# Altium PCB AudioAmp.PcbDoc
Units mil, origin at the board's own origin, x right, y up, seen from the top; angles counter-clockwise.
Board outline 3630 x 3543 mil, 2 copper layers (Top Layer, Bottom Layer); 197 components, 123 nets, 575 pads, 0 vias.
Unrouted connection lines stored in the file: 432.
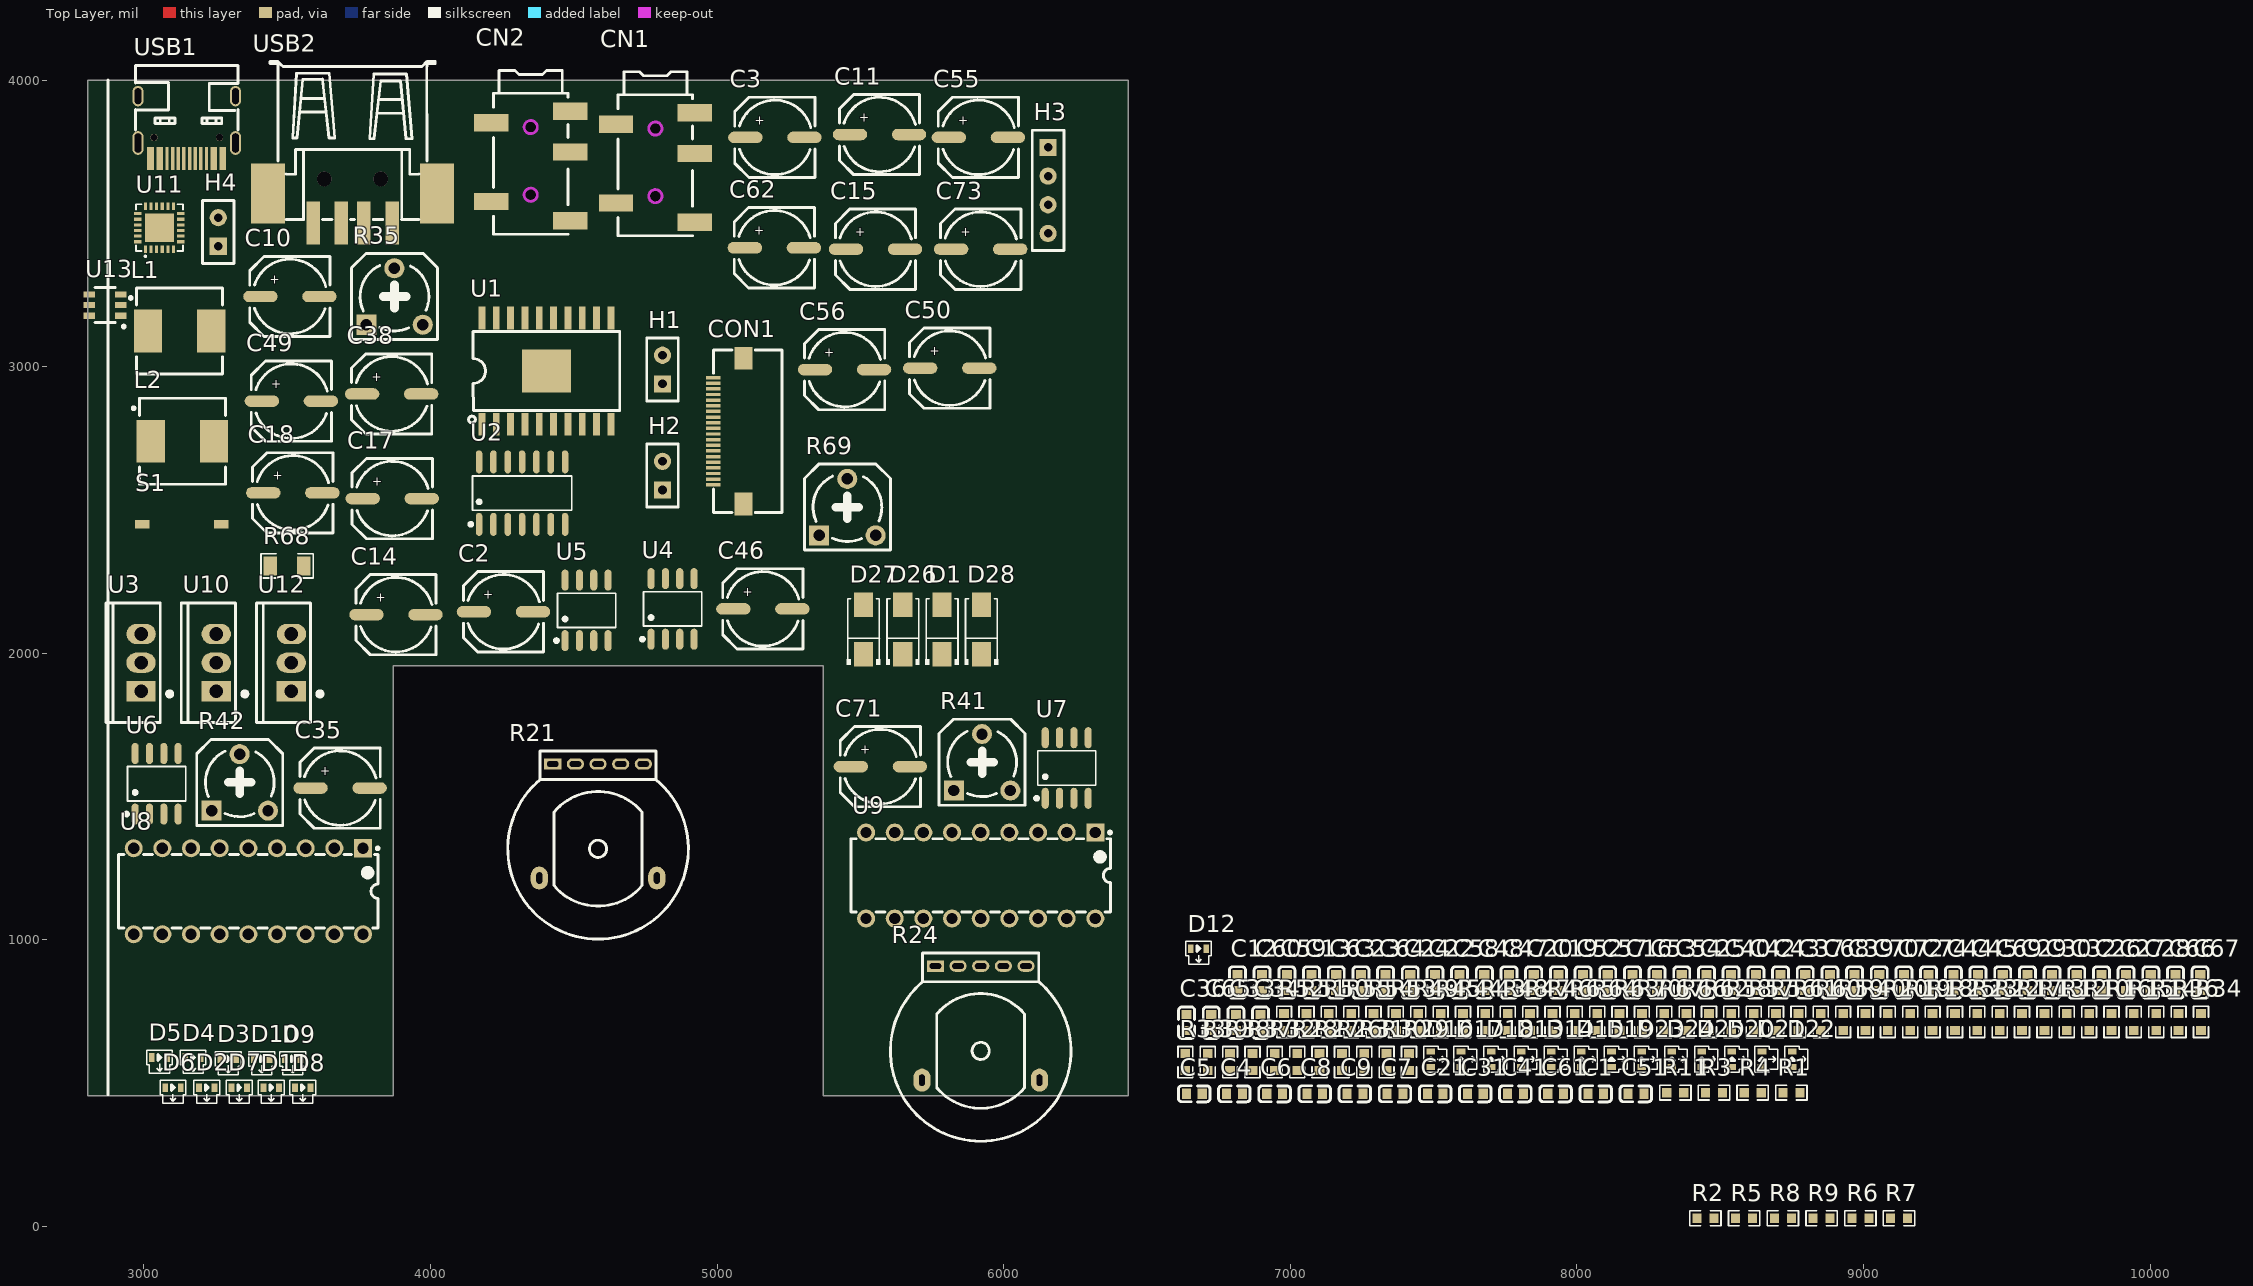
[diagram p0: Top Layer view]
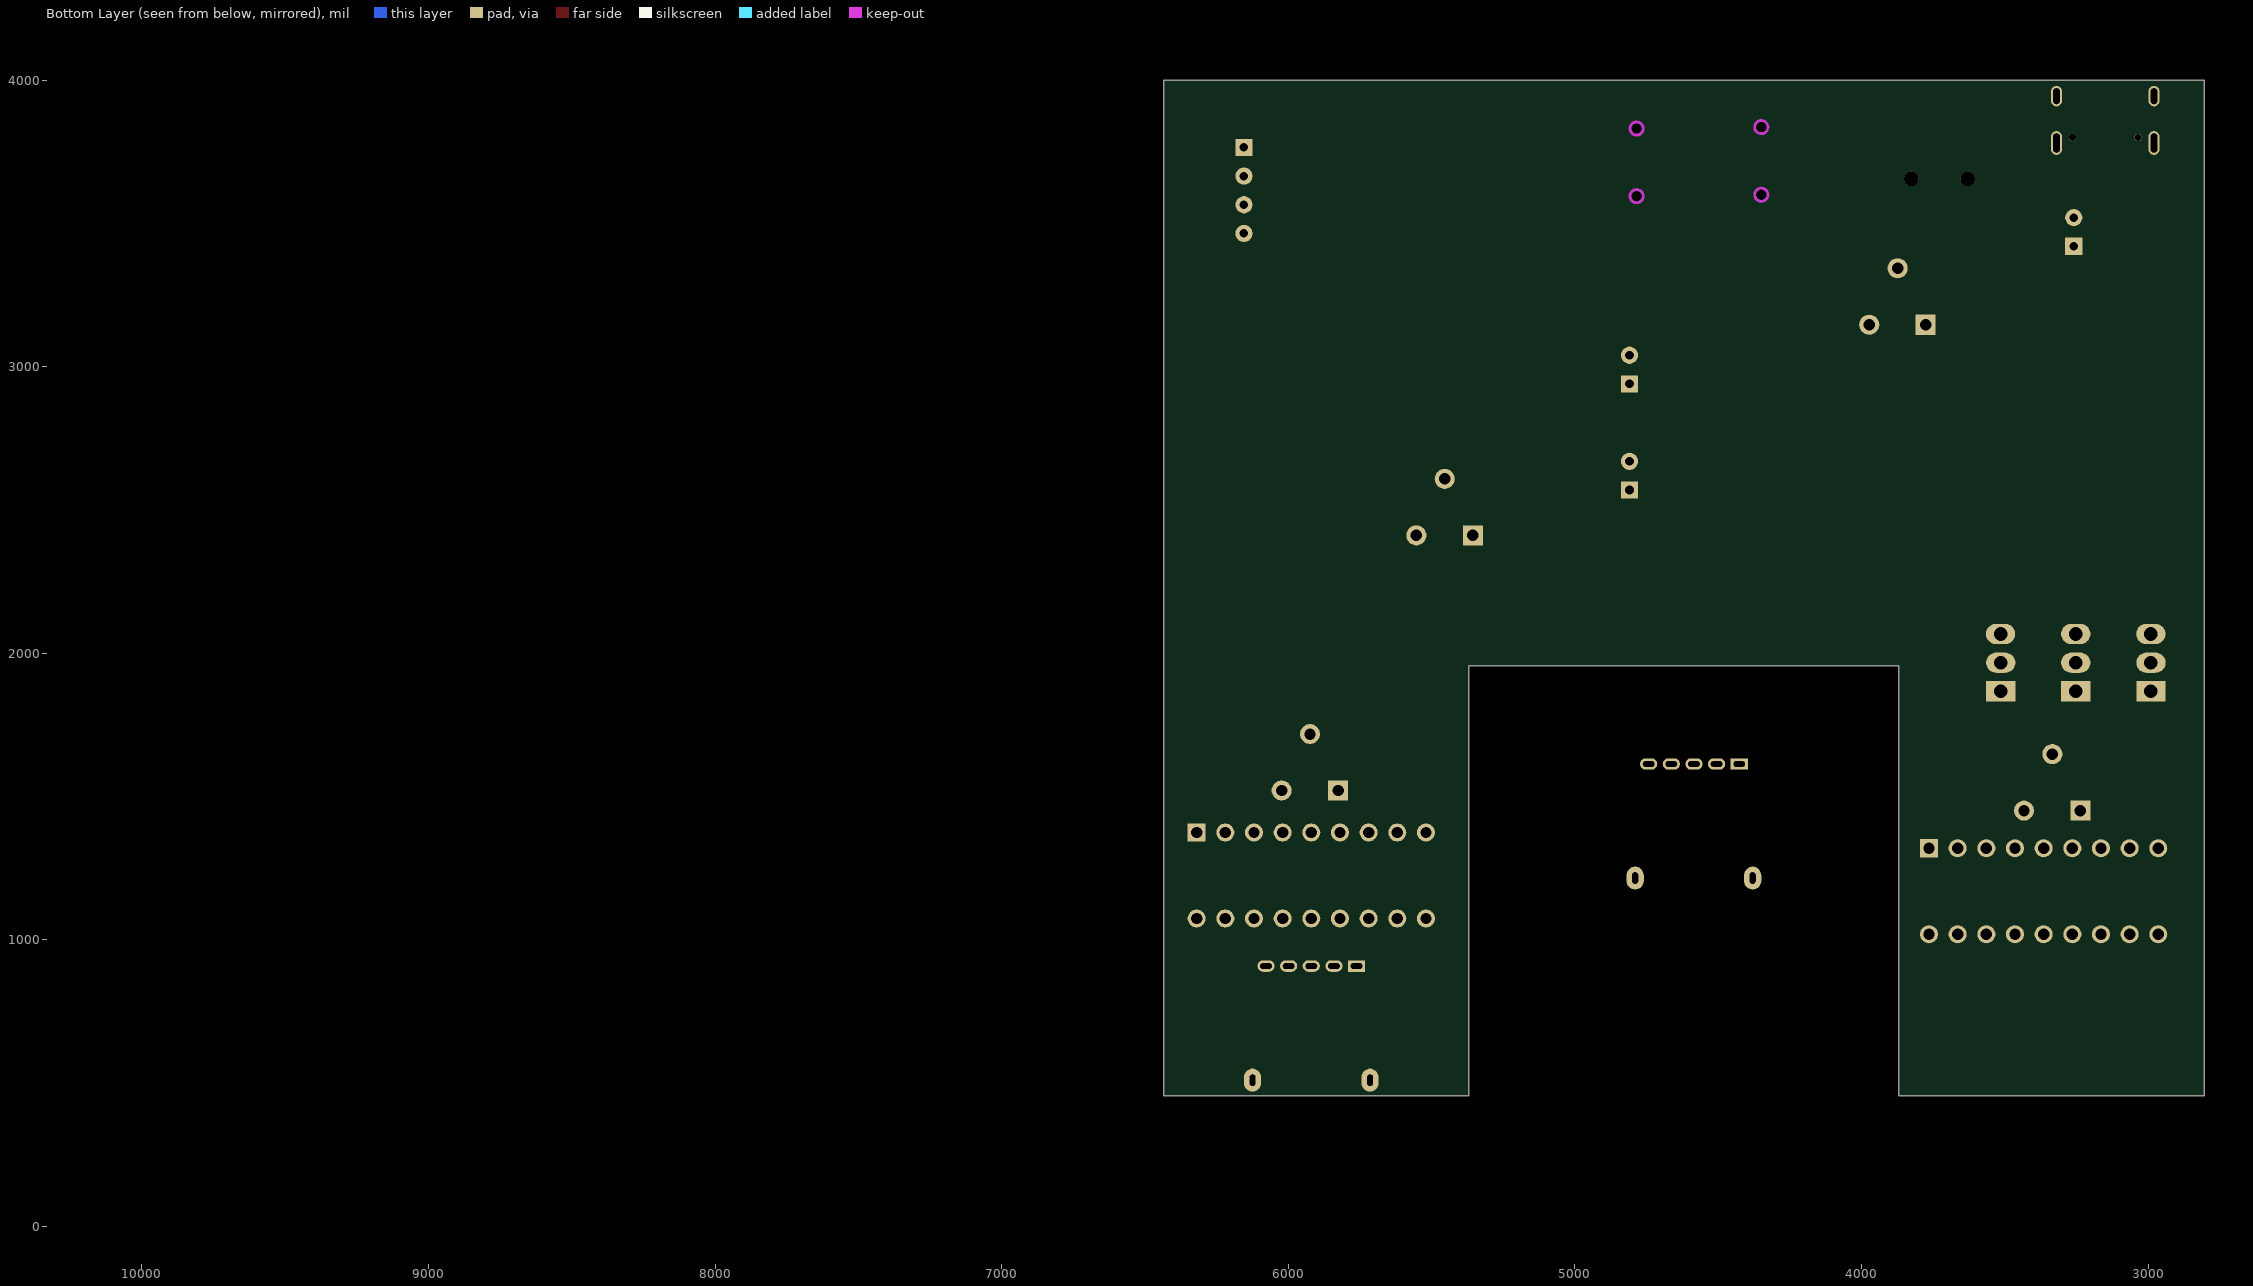
[diagram p1: Bottom Layer view, seen from below]

## Layer stack, top to bottom
Top Solder: solder mask 0.4, Solder Resist, Dk 3.5
Top Layer: signal copper 1.4
Dielectric 1: dielectric 12.6, FR-4, Dk 4.8
Bottom Layer: signal copper 1.4
Bottom Solder: solder mask 0.4, Solder Resist, Dk 3.5

## Board outline
2805,457 2805,4000 6435,4000 6435,457 5370,457 5370,1957 3870,1957 3870,457

## Design rules (kind name [scope] priority, off if disabled: settings)
Clearance [All] p1: gap=10 ignorepadtopadclearanceinfootprint=FALSE except(0: Arc-Hole Track-Hole SMDPad-Hole THPad-Hole Via-Hole Fill-Hole Poly-Hole Region-Hole Text-Hole)
PolygonConnect [All] p1: connectstyle=Relief reliefconductorwidth=10 reliefentries=4 polygonreliefangle="90 Angle" airgapwidth=10
RoomDefinition Audio_VU_LED [InComponentClass('Audio_VU_LED')] p1: confinementstyle=ConfineIn formatcopy=TRUE lockcomponents=FALSE outline 395,0 2395,0 2395,1000 395,1000
RoomDefinition Audio_Power [InComponentClass('Audio_Power')] p2: confinementstyle=ConfineIn formatcopy=TRUE lockcomponents=FALSE outline 400,1200 2400,1200 2400,2200 400,2200
RoomDefinition Audio_Amp [InComponentClass('Audio_Amp')] p3: confinementstyle=ConfineIn formatcopy=TRUE lockcomponents=FALSE outline 370,2550 2370,2550 2370,3550 370,3550
RoutingVias [All] p1: holewidth=28 width=50 viastyle="Through Hole" minholewidth=28 minwidth=50 maxholewidth=28 maxwidth=50
SolderMaskExpansion [All] p1: expansion=4 istentingtop=FALSE
Width [All] p1: maxlimit=10 minlimit=10 preferedwidth=10
30 further rules are at their usual default settings.

## Components (designator, comment, footprint, x,y, rotation, side; value= is the part's Value field where it differs from the comment)
C1 "CAP" C0603 8065.94,463.25 r0 top value=10uF
C2 "CAP_POL" CAP_SMD_6.3MM 4255,2145 r0 top value=220uF
C3 "CAP_POL" CAP_SMD_6.3MM 5202,3800 r0 top value=220uF
C4 "CAP" C0603 6805.4,463.25 r0 top value=10uF
C5 "CAP" C0603 6665.34,463.25 r0 top value=100nF
C6 "CAP" C0603 6945.45,463.25 r0 top value=10uF
C7 "CAP" C0603 7365.64,463.25 r0 top value=100nF
C8 "Cap" C0603 7085.52,463.25 r0 top value=1nF
C9 "CAP" C0603 7225.57,463.25 r0 top value=10uF
C10 "CAP_POL" CAP_SMD_6.3MM 3510,3245 r0 top value=220uF
C11 "CAP_POL" CAP_SMD_6.3MM 5567,3810 r0 top value=220uF
C12 "CAP" C0603 6815.78,851.88 r90 top value=10uF
C13 "CAP" C0603 7074.14,851.88 r90 top value=10uF
C14 "CAP_POL" CAP_SMD_6.3MM 3880,2135 r0 top value=220uF
C15 "CAP_POL" CAP_SMD_6.3MM 5553,3410 r0 top value=220uF
C16 "CAP" C0603 8193.72,851.88 r90 top value=10uF
C17 "CAP_POL" CAP_SMD_6.3MM 3867,2540 r0 top value=220uF
C18 "CAP_POL" CAP_SMD_6.3MM 3520,2560 r0 top value=220uF
C19 "Cap" C0603 7935.35,851.88 r90 top value=1nF
C20 "Cap" C0603 7849.23,851.88 r90 top value=1nF
C21 "Cap" C0603 7505.69,463.25 r0 top value=1nF
C22 "CAP" C0603 7504.75,851.88 r90 top value=2.7nF
C23 "CAP" C0603 7246.39,851.88 r90 top value=2.7nF
C24 "CAP" C0603 7418.63,851.88 r90 top value=1uF
C25 "CAP" C0603 8452.08,851.88 r90 top value=1uF
C26 "CAP" C0603 9830.02,851.88 r90 top value=1uF
C27 "CAP" C0603 9916.14,851.88 r90 top value=1uF
C28 "CAP" C0603 10002.26,851.88 r90 top value=2.7nF
C29 "CAP" C0603 9571.65,851.88 r90 top value=2.7nF
C30 "Cap" C0603 9657.77,851.88 r90 top value=1nF
C31 "Cap" C0603 7645.76,463.25 r0 top value=1nF
C32 "CAP" C0603 9743.9,851.88 r90 top value=10uF
C33 "CAP" C0603 6810.41,711.82 r90 top value=4.7uF
C34 "CAP" C0603 6896.53,711.82 r90 top value=10uF
C35 "CAP_POL" CAP_SMD_6.3MM 3685,1530 r0 top value=220uF
C36 "CAP" C0603 6638.17,711.82 r90 top value=10uF
C37 "CAP" C0603 8796.56,851.88 r90 top value=100nF
C38 "CAP_POL" CAP_SMD_6.3MM 3865,2905 r0 top value=100uF
C39 "CAP" C0603 8968.81,851.88 r90 top value=10uF
C40 "CAP" C0603 8538.2,851.88 r90 top value=10uF
C41 "CAP" C0603 7785.81,463.25 r0 top value=10uF
C42 "CAP" C0603 8624.32,851.88 r90 top value=4.7uF
C43 "CAP" C0603 8710.44,851.88 r90 top value=4.7uF
C44 "CAP" C0603 9313.29,851.88 r90 top value=4.7uF
C45 "CAP" C0603 9399.41,851.88 r90 top value=100nF
C46 "CAP_POL" CAP_SMD_6.3MM 5160,2155 r0 top value=100uF
C47 "CAP" C0603 7763.11,851.88 r90 top value=100nF
C48 "CAP" C0603 7676.99,851.88 r90 top value=100nF
C49 "CAP_POL" CAP_SMD_6.3MM 3515,2880 r0 top value=100uF
C50 "CAP_POL" CAP_SMD_6.3MM 5812,2995 r0 top value=100uF
C51 "CAP" C0603 8206,463.25 r0 top value=10nF
C52 "CAP" C0603 8021.48,851.88 r90 top value=10nF
C53 "CAP" C0603 8279.84,851.88 r90 top value=10uF
C54 "CAP" C0603 8365.96,851.88 r90 top value=10uF
C55 "CAP_POL" CAP_SMD_6.3MM 5912,3800 r0 top value=220uF
C56 "CAP_POL" CAP_SMD_6.3MM 5445,2990 r0 top value=220uF
C57 "CAP" C0603 8107.6,851.88 r90 top value=1uF
C58 "CAP" C0603 7590.87,851.88 r90 top value=2.2nF
C59 "CAP" C0603 6988.02,851.88 r90 top value=10uF
C60 "CAP" C0603 6901.9,851.88 r90 top value=10uF
C61 "CAP" C0603 7925.88,463.25 r0 top value=2.2uF
C62 "CAP_POL" CAP_SMD_6.3MM 5200,3415 r0 top value=220uF
C63 "CAP" C0603 7160.27,851.88 r90 top value=1uF
C64 "CAP" C0603 7332.51,851.88 r90 top value=100nF
C65 "CAP" C0603 6724.29,711.82 r90 top value=10uF
C66 "CAP" C0603 10088.38,851.88 r90 top value=10uF
C67 "CAP" C0603 10174.5,851.88 r90 top value=100nF
C68 "CAP" C0603 8882.68,851.88 r90 top value=1uF
C69 "CAP" C0603 9485.53,851.88 r90 top value=100nF
C70 "CAP" C0603 9054.93,851.88 r90 top value=1uF
C71 "CAP_POL" CAP_SMD_6.3MM 5570,1605 r0 top value=220uF
C72 "CAP" C0603 9141.05,851.88 r90 top value=1uF
C73 "CAP_POL" CAP_SMD_6.3MM 5920,3410 r0 top value=220uF
C74 "CAP" C0603 9227.17,851.88 r90 top value=1uF
CN1 "Audio3.5Con" Audio3.5_3Pin 4785,3695 r270 top
CN2 "Audio3.5Con" Audio3.5_3Pin 4350,3700 r270 top
CON1 "AFC01-S20FCC-00" FPC-SMD_20P_0.5 5040,2775 r270 top
D1 "Diode SBD" SMA_L4.3 5785.26,2082.98 r90 top
D2 "LED" LED0603_Side 3220,485 r270 top
D3 "LED" LED0603_Side 3295,585 r270 top
D4 "LED" LED0603_Side 3172,590 r270 top
D5 "LED" LED0603_Side 3055,590 r270 top
D6 "LED" LED0603_Side 3102,485 r270 top
D7 "LED" LED0603_Side 3333,485 r270 top
D8 "LED" LED0603_Side 3555,485 r270 top
D9 "LED" LED0603_Side 3520,585 r270 top
D10 "LED" LED0603_Side 3412,585 r270 top
D11 "LED" LED0603_Side 3445,485 r270 top
D12 "LED" LED0603_Side 6680,970 r270 top
D13 "LED" LED0603_Side 7805.68,583.98 r0 top
D14 "LED" LED0603_Side 7910.68,583.98 r0 top
D15 "LED" LED0603_Side 8015.68,583.98 r0 top
D16 "LED" LED0603_Side 7490.68,583.98 r0 top
D17 "LED" LED0603_Side 7595.68,583.98 r0 top
D18 "LED" LED0603_Side 7700.68,583.98 r0 top
D19 "LED" LED0603_Side 8120.68,583.98 r0 top
D20 "LED" LED0603_Side 8540.68,583.98 r0 top
D21 "LED" LED0603_Side 8645.68,583.98 r0 top
D22 "LED" LED0603_Side 8750.68,583.98 r0 top
D23 "LED" LED0603_Side 8225.68,583.98 r0 top
D24 "LED" LED0603_Side 8330.68,583.98 r0 top
D25 "LED" LED0603_Side 8435.68,583.98 r0 top
D26 "Diode SBD" SMA_L4.3 5648.21,2082.98 r90 top
D27 "Diode SBD" SMA_L4.3 5511.17,2082.98 r90 top
D28 "Diode SBD" SMA_L4.3 5922.31,2082.98 r90 top
H1 "Header_P2" H_2.54_P2 4810,2990 r90 top
H2 "Header_P2" H_2.54_P2 4810,2620 r90 top
H3 "Header_P4" H_2.54_P4 6155,3615 r270 top
H4 "Header_P2" H_2.54_P2 3260,3470 r90 top
L1 "INDU" SMD_L7.1 3125,3125 r0 top value=1uH
L2 "INDU" SMD_L7.1 3135,2740 r0 top value=4.7uH
R1 "Reg" R0603 8748.44,467.41 r0 top value=1K
R2 "Reg" R0603 8448.5,29.01 r0 top value=1K
R3 "Reg" R0603 8478.31,467.41 r0 top value=1K
R4 "Reg" R0603 8613.38,467.41 r0 top value=1K
R5 "Reg" R0603 8583.56,29.01 r0 top value=1K
R6 "Reg" R0603 8988.75,29.01 r0 top value=1K
R7 "Reg" R0603 9123.81,29.01 r0 top value=1K
R8 "Reg" R0603 8718.62,29.01 r0 top value=1K
R9 "Reg" R0603 8853.68,29.01 r0 top value=10K
R10 "Reg" R0603 9787.07,714.01 r90 top value=50R
R11 "Reg" R0603 8343.25,467.41 r0 top value=50R
R12 "Reg" R0603 9709.05,714.01 r90 top value=10K
R13 "Reg" R0603 9631.04,714.01 r90 top value=1K
R14 "Reg" R0603 10021.12,714.01 r90 top value=1K
R15 "Reg" R0603 9943.1,714.01 r90 top value=1K
R16 "Reg" R0603 9865.08,714.01 r90 top value=1K
R17 "Reg" R0603 9553.02,714.01 r90 top value=1K
R18 "Reg" R0603 9240.96,714.01 r90 top value=1K
R19 "Reg" R0603 9162.94,714.01 r90 top value=1K
R20 "Reg" R0603 9084.92,714.01 r90 top value=1K
R21 "Res_Tap_2" RES_TAP_5Pin 4585,1415 r180 top
R22 "Reg" R0603 9475,714.01 r90 top value=1K
R23 "Reg" R0603 9396.99,714.01 r90 top value=1K
R24 "Res_Tap_2" RES_TAP_5Pin 5920,710 r180 top
R25 "Reg" R0603 9318.97,714.01 r90 top value=1K
R26 "Reg" R0603 7180.12,573.95 r90 top value=1K
R27 "Reg" R0603 7102.1,573.95 r90 top value=10K
R28 "Reg" R0603 7024.09,573.95 r90 top value=10K
R29 "Reg" R0603 7414.17,573.95 r90 top value=1K
R30 "Reg" R0603 7336.15,573.95 r90 top value=1K
R31 "Reg" R0603 7258.14,573.95 r90 top value=1K
R32 "Reg" R0603 6946.07,573.95 r90 top value=1K
R33 "Reg" R0603 6634.01,573.95 r90 top value=10K
R34 "Reg" R0603 10177.15,714.01 r90 top value=1K
R35 "Res Tap" RES_TAP_HOR 3875,3245 r0 top value=10K
R36 "Reg" R0603 10099.13,714.01 r90 top value=1K
R37 "Reg" R0603 6868.06,573.95 r90 top value=1K
R38 "Reg" R0603 6790.04,573.95 r90 top value=10R
R39 "Reg" R0603 6712.02,573.95 r90 top value=10R
R40 "Reg" R0603 9006.91,714.01 r90 top value=10K
R41 "Res Tap" RES_TAP_HOR 5925,1620 r0 top value=10K
R42 "Res Tap" RES_TAP_HOR 3335,1550 r0 top value=10K
R43 "Reg" R0603 7680.64,714.01 r90 top value=10R
R44 "Reg" R0603 7602.62,714.01 r90 top value=10R
R45 "Reg" R0603 7524.6,714.01 r90 top value=1K
R46 "Reg" R0603 7914.68,714.01 r90 top value=10R
R47 "Reg" R0603 7836.67,714.01 r90 top value=10R
R48 "Reg" R0603 7758.65,714.01 r90 top value=1K
R49 "Reg" R0603 7446.59,714.01 r90 top value=1K
R50 "Reg" R0603 7134.52,714.01 r90 top value=100R
R51 "Reg" R0603 7056.51,714.01 r90 top value=100R
R52 "Reg" R0603 6978.49,714.01 r90 top value=10k
R53 "Reg" R0603 7368.57,714.01 r90 top value=10k
R54 "Reg" R0603 7290.56,714.01 r90 top value=20K
R55 "Reg" R0603 7212.54,714.01 r90 top value=20K
R56 "Reg" R0603 8694.84,714.01 r90 top value=560R
R57 "Reg" R0603 8616.83,714.01 r90 top value=1K
R58 "Reg" R0603 8538.81,714.01 r90 top value=560R
R59 "Reg" R0603 8928.89,714.01 r90 top value=1K
R60 "Reg" R0603 8850.88,714.01 r90 top value=0R
R61 "Reg" R0603 8772.86,714.01 r90 top value=1K
R62 "Reg" R0603 8460.8,714.01 r90 top value=0R
R63 "Reg" R0603 8148.73,714.01 r90 top value=2R
R64 "Reg" R0603 8070.72,714.01 r90 top value=1K
R65 "Reg" R0603 7992.7,714.01 r90 top value=100K
R66 "Reg" R0603 8382.78,714.01 r90 top value=2M
R67 "Reg" R0603 8304.76,714.01 r90 top value=1M
R68 "Reg" R1206 3500,2305 r0 top value=0.01R
R69 "Res Tap" RES_TAP_HOR 5455,2510 r0 top value=10K
R70 "Reg" R0603 8226.75,714.01 r90 top value=300R
S1 "KEY-2P" KEY_SOT_P2 3120,2455 r180 top
U1 "TPA6120A2DWP" HSOP-20 4405,2985.04 r0 top
U2 "OPA4134UA" SOIC-14 4320,2559.02 r0 top
U3 "LM78XX" TO-220-3_2.54 2990.72,1967.52 r90 top
U4 "LM386D" SOP-8 4845,2155 r0 top
U5 "LM386D" SOP-8 4545,2150 r0 top
U6 "LM386D" SOP-8 3045,1545 r0 top
U7 "LM386D" SOP-8 6220,1600 r0 top
U8 "XD3915" DIP-18 3365,1170 r180 top
U9 "XD3915" DIP-18 5920,1225 r180 top
U10 "LM78XX" TO-220-3_2.54 3252.89,1967.52 r90 top
U11 "IP5209" QFN-24 3054.84,3485.1 r0 top
U12 "LM79XX" TO-220-3_2.54 3515.05,1967.52 r90 top
U13 "SX1308" SOT-23-6 2865,3215 r0 top
USB1 "TYPEC-304-ACP16" USB-C-SMD_TYPE-C-16P 3150,3840 r180 top
USB2 "USB_TypeA母座" USB_TYPEA-SMD 3728.42,3578.22 r180 top

## Footprints (in the part's own frame and the unit in brackets; to place one, negate y for a bottom-side part, rotate by r counter-clockwise, add the part's x,y. Pads: shape width x height; smd on the part's side, far side on the other; paste and mask are expansions set on the pad)
Audio3.5_3Pin [mil] "3.5mm3Pin音频接口"
  rect 60x120 smd: 1(-191,137.5) 2(191,137.5) 3(124,-137.5) 4(-49,137.5) 5(-151,-137.5)
  Keep-Out Layer board cut-out: -136,-23 -144.8,-21.25 -152.26,-16.26 -157.25,-8.8 -159,0 -159,0 -157.25,8.8 -152.26,16.26 -144.8,21.25 -136,23 -136,23 -127.2,21.25 -119.74,16.26 -114.75,8.8 -113,0 -113,0 -114.75,-8.8 -119.74,-16.26 -127.2,-21.25 -136,-23
  Keep-Out Layer board cut-out: 77,0 78.75,-8.8 83.74,-16.26 91.2,-21.25 100,-23 100,-23 108.8,-21.25 116.26,-16.26 121.25,-8.8 123,0 123,0 121.25,8.8 116.26,16.26 108.8,21.25 100,23 100,23 91.2,21.25 83.74,16.26 78.75,8.8 77,0
  Keep-Out Layer circle w10: c-136,0 r23
  Keep-Out Layer circle w10: c100,0 r23
  silkscreen extent -334,-130 238,130, body extent -389,-179 359,175, height 218
C0603 [mm]
  rect 0.8x0.9 smd: 1(-0.7,0) 2(0.7,0)
  silkscreen extent -1.41,-0.71 1.39,0.72, body extent -0.8,-0.41 0.8,0.45, height 0.89
CAP_SMD_6.3MM [mil] "SMD电容,10mm"
  oval 120x40 smd: 1(-103,0) 2(103,0)
  silkscreen extent -140,-140 140,140, body extent -137,-130 139,130, height 154
DIP-18 [mm]
  rect 1.6x1.6 hole 1: 1(-10.16,-3.81)
  round 1.6 hole 1: 2(-7.62,-3.81) 3(-5.08,-3.81) 4(-2.54,-3.81) 5(0,-3.81) 6(2.54,-3.81) 7(5.08,-3.81) 8(7.62,-3.81) 9(10.16,-3.81) 10(10.16,3.81) 11(7.62,3.81) 12(5.08,3.81) 13(2.54,3.81) 14(0,3.81) 15(-2.54,3.81) 16(-5.08,3.81) 17(-7.62,3.81) 18(-10.16,3.81)
  silkscreen extent -11.58,-3.93 11.5,3.25, body extent -11,-3.81 11,4.06, height 5
FPC-SMD_20P_0.5 [mm] "FPC连接器"
  rect 0.3x1.3 smd: 1(-4.752,-1.339) 2(-4.252,-1.339) 3(-3.752,-1.339) 4(-3.252,-1.339) 5(-2.752,-1.339) 6(-2.252,-1.339) 7(-1.752,-1.339) 8(-1.252,-1.339) 9(-0.752,-1.339) 10(-0.252,-1.339) 11(0.248,-1.339) 12(0.748,-1.339) 13(1.248,-1.339) 14(1.748,-1.339) 15(2.248,-1.339) 16(2.748,-1.339) 17(3.248,-1.339) 18(3.748,-1.339) 19(4.248,-1.339) 20(4.748,-1.339)
  rect 2x1.6 smd: 21(6.45,1.339) 22(-6.45,1.339)
  silkscreen extent -7.2,-1.34 7.2,4.76
H_2.54_P2 [mil] "2Pin Header"
  rect 60x60 hole 30: 1(-50,0)
  round 60 hole 30: 2(50,0)
  silkscreen extent -110,-55 110,55, body extent -100,-50 100,50, height 336
H_2.54_P4 [mil]
  rect 60x60 hole 30: 1(-150,0)
  round 60 hole 30: 2(-50,0) 3(50,0) 3(150,0)
  silkscreen extent -210,-55 210,55, body extent -200,-45 100,55, height 315
HSOP-20 [mm]
  rect 0.6x2 smd: 1(-5.715,-4.7) 2(-4.445,-4.7) 3(-3.175,-4.7) 4(-1.905,-4.7) 5(-0.635,-4.7) 6(0.635,-4.7) 7(1.905,-4.7) 8(3.175,-4.7) 9(4.445,-4.7) 10(5.715,-4.7) 11(5.715,4.7) 12(4.445,4.7) 13(3.175,4.7) 14(1.905,4.7) 15(0.635,4.7) 16(-0.635,4.7) 17(-1.905,4.7) 18(-3.175,4.7) 19(-4.445,4.7) 20(-5.715,4.7)
  rect 4.32x3.81 smd: 21(0,0)
  silkscreen extent -6.9,-4.6 6.5,3.5
KEY_SOT_P2 [mil] "KEY_SOT_P2"
  rect 50x30 smd: 1(125.59,5) 2(-150,5)
  body extent -174,-67 147,75, height 98
LED0603_Side [mil]
  rect 30x20 smd: 1(0,27) 2(0,-27)
  silkscreen extent -25,-45 55,45
QFN-24 [mm]
  rect 0.28x0.665 smd: 1(-1.25,-1.907) 2(-0.75,-1.907) 3(-0.25,-1.907) 4(0.25,-1.907) 5(0.75,-1.907) 6(1.25,-1.907) 13(1.25,1.907) 14(0.75,1.907) 15(0.25,1.907) 16(-0.25,1.907) 17(-0.75,1.907) 18(-1.25,1.907)
  rect 0.665x0.28 smd: 7(1.907,-1.25) 8(1.907,-0.75) 9(1.907,-0.25) 10(1.907,0.25) 11(1.907,0.75) 12(1.907,1.25) 19(-1.907,1.25) 20(-1.907,0.75) 21(-1.907,0.25) 22(-1.907,-0.25) 23(-1.907,-0.75) 24(-1.907,-1.25)
  rect 2.55x2.55 smd: 25(0,0)
  silkscreen extent -2.08,-2.61 2.08,2.08, body extent -2,-2 2,2, height 0.9
R0603 [mil]
  rect 31.75x34.02 smd: 1(-29.66,0) 2(29.66,0)
  silkscreen extent -55,-26 55,26, body extent -31,-17 32,17, height 19
R1206 [mil]
  rect 47.54x66.97 smd: 1(-58.22,0) 2(58.22,0)
  silkscreen extent -91,-42 91,42, body extent -63,-31 63,32, height 22
RES_TAP_5Pin [mil] "双联电位器"
  rect 60x40 hole 20 slot 40 at 0 deg: 1(158,-199)
  oval 60x40 hole 20 slot 40 at 0 deg: 2(79,-199) 3(0,-199) 4(-79,-199) 5(-158,-199)
  oval 60x80 hole 40 slot 20 at 0 deg: 6(-205,199) 6(205,199)
  silkscreen extent -315,-244 315,412
RES_TAP_HOR [mil] "卧式电位器"
  rect 70x70 hole 40: 1(-98.5,-98.5)
  round 70 hole 40: 2(98.5,-98.5) 3(-0.5,98.5)
  silkscreen extent -150,-150 150,150
SMA_L4.3 [mm] "SMA_DIode"
  rect 2.185x1.7 smd: 1(-2.2,0) 2(2.2,0)
  silkscreen extent -3.11,-1.48 2.73,1.48, body extent -2.6,-1.3 2.6,1.3, height 2.4
SMD_L7.1 [mm]
  rect 2.5x3.8 smd: 1(-2.8,0) 2(2.8,0)
  silkscreen extent -4.44,-3.81 3.81,3.81, body extent -3.65,-3.3 3.65,3.3, height 4.95
SOIC-14 [mil]
  oval 22.6x80.24 smd: 1(-150,-109.02) 2(-100,-109.02) 3(-50,-109.02) 4(0,-109.02) 5(50,-109.02) 6(100,-109.02) 7(150,-109.02) 8(150,109.02) 9(100,109.02) 10(50,109.02) 11(0,109.02) 12(-50,109.02) 13(-100,109.02) 14(-150,109.02)
  silkscreen extent -185,-115 173,60
SOP-8 [mm]
  oval 0.63x1.865 smd: 1(-1.905,-2.682) 2(-0.635,-2.682) 3(0.635,-2.682) 4(1.905,-2.682) 5(1.905,2.682) 6(0.635,2.682) 7(-0.635,2.682) 8(-1.905,2.682)
  silkscreen extent -2.82,-2.83 2.58,1.52, body extent -2.49,-2.92 2.41,3.06, height 1.58
SOT-23-6 [mm]
  rect 1x0.55 smd: 1(1.4,-0.95) 2(1.4,0) 3(1.4,0.95) 4(-1.4,0.95) 5(-1.4,0) 6(-1.4,-0.95)
  silkscreen extent -0.9,-2.03 1.78,1.55, body extent -1.21,-1.4 1.21,1.4, height 1.09
TO-220-3_2.54 [mm]
  rect 1.8x2.6 hole 1.2: 1(-2.54,0.005)
  oval 1.8x2.6 hole 1.2: 2(0,0.005) 3(2.54,-0.005)
  silkscreen extent -5.3,-2.73 5.3,3.09, body extent -4.95,-1.96 4.95,2.54, height 19.31
USB-C-SMD_TYPE-C-16P [mm] "全引脚USB TYPEC母座"
  rect 0.6x2.032 smd: A1B12(-3.2,2.893) A4B9(-2.4,2.893) B1A12(3.2,2.893) B4A9(2.4,2.893)
  rect 0.3x2.032 smd: A5(-1.25,2.893) A6(-0.25,2.893) A7(0.25,2.893) A8(1.25,2.893) B5(1.75,2.893) B6(0.75,2.893) B7(-0.75,2.893) B8(-1.75,2.893)
  oval 1x1.8 hole 0.6 slot 1.4 at 90 deg: EP(-4.32,-2.639) EP(4.32,-2.639)
  oval 1x2.1 hole 0.6 slot 1.7 at 90 deg: EP(-4.32,1.511) EP(4.32,1.511)
  round 0.65 hole 0.65 unplated: ""(-2.9,1.011) ""(2.9,1.021)
  silkscreen extent -4.55,-5.37 4.55,0.36, body extent -4.47,-5.32 4.47,2.58, height 3.13
USB_TYPEA-SMD [mm] "USBA母座"
  rect 1.2x3.8 smd: 1(-3.505,1.95) 2(-1.005,1.95) 3(0.996,1.95) 4(3.496,1.95)
  rect 3x5.3 smd: 5(-7.5,-0.65) 5(7.5,-0.65)
  round 1.3 hole 1.3 unplated: ""(-2.5,-1.95) ""(2.5,-1.95)
  silkscreen extent -7.32,-12.35 7.33,1.65, body extent -8.39,-12.45 8.39,3.07, height 7.95

## Part data
C1 C4 C5 C6 C7 C9 C12 C13 C16 C22 C23 C24 C25 C26 C27 C28 C29 C32 C33 C34 C36 C37 C39 C40 C41 C42 C43 C44 C45 C47 C48 C51 C52 C53 C54 C57 C58 C59 C60 C61 C63 C64 C65 C66 C67 C68 C69 C70 C72 C74: "Cap", BOM_Manufacturer="Huaxin S&T", BOM_Manufacturer Part=0603B103K101CT, BOM_Supplier=LCSC, BOM_Supplier Part=C302008, Contributor=LCSC, nameAlias=Capacitance, spicePre=C, spiceSymbolName=0603B103K101CT
C2 C3 C10 C11 C14 C15 C17 C18 C35 C38 C46 C49 C50 C55 C56 C62 C71 C73: "极性电容"
C8 C19 C20 C21 C30 C31: library part CAP, BOM_Manufacturer="Huaxin S&T", BOM_Manufacturer Part=0603B103K101CT, BOM_Supplier=LCSC, BOM_Supplier Part=C302008, Contributor=LCSC, nameAlias=Capacitance, spicePre=C, spiceSymbolName=0603B103K101CT
CN1 CN2: library part AudioCon3, "3.5mm 3Pin 音频接口", BOM_JLCPCB Part Class="Extended Part", BOM_Manufacturer=G-Switch(品赞), BOM_Manufacturer Part=PJ-393, BOM_Supplier=LCSC, BOM_Supplier Part=C2837065, Contributor=LCSC, spicePre=C, spiceSymbolName=PJ-393_C2837065
CON1: library part FPC_CONN_20, "FPC连接器20Pin", BOM_JLCPCB Part Class="Extended Part", BOM_Manufacturer=JUSHUO, BOM_Manufacturer Part=AFC01-S20FCC-00, BOM_Supplier=LCSC, BOM_Supplier Part=C262274, Contributor=LCSC, spicePre=F, spiceSymbolName=AFC01-S20FCC-00
D1 D26 D27 D28: "Schottky Rectifier", ComponentLink1Description="Manufacturer Link", ComponentLink1URL=http://www.irf.com/, ComponentLink2Description=Datasheet, ComponentLink2URL=http://www.irf.com/product-info/datasheets/data/10tq.pdf, DatasheetVersion=PD-2.057B, LatestRevisionDate=17-Jul-2002, LatestRevisionNote="Re-released for DXP Platform.", Note="Terminal 2 is the TAB and is electrically connected to the cathode", PackageDescription="TO, Thru-Hole, Vertical, Heatsink Mounted; 3 In-Line Leads (1 Absent); Pitch 2.54 mm", PackageReference=TO-220AC, PackageVersion=Feb-1998, Published=8-Jun-2000, Publisher="Altium Limited"
D2 D3 D4 D5 D6 D7 D8 D9 D10 D11 D12 D13 D14 D15 D16 D17 D18 D19 D20 D21 D22 D23 D24 D25: library part LED0, LatestRevisionDate=08-Jul-2005, LatestRevisionNote="Mech Layer 1 removed.", PackageDescription="LED; 2 Leads", PackageReference=LED-0, Published=8-Jun-2000, Publisher="Altium Limited"
H1 H2 H4: "2Pin排针"
H3: "4Pin排针"
L1 L2: library part IND, "电感", BOM_JLCPCB Part Class="Extended Part", BOM_Manufacturer="Sunltech Tech", BOM_Manufacturer Part=SLO0630H150MTT, BOM_Supplier=LCSC, BOM_Supplier Part=C182182, Contributor=LCSC, nameAlias=Inductance, spicePre=L, spiceSymbolName=SLO0630H150MTT
R1 R2 R3 R4 R5 R6 R7 R8 R9 R10 R11 R12 R13 R14 R15 R16 R17 R18 R19 R20 R22 R23 R25 R26 R27 R28 R29 R30 R31 R32 R33 R34 R36 R37 R38 R39 R40 R43 R44 R45 R46 R47 R48 R49 R50 R51 R52 R53 R54 R55 R56 R57 R58 R59 R60 R61 R62 R63 R64 R65 R66 R67 R68 R70: library part Res, "电阻", BOM_Manufacturer="Viking Tech", BOM_Manufacturer Part=AR03BTCX1002A, BOM_Supplier=LCSC, BOM_Supplier Part=C465721, Contributor=LCSC, nameAlias="Resistance (Ohms)", spicePre=R, spiceSymbolName=AR03BTCX1002A
R21 R24: "双联电位器"
R35 R41 R42 R69: "可调电阻", LatestRevisionDate=17-Jul-2002, LatestRevisionNote="Re-released for DXP Platform.", PackageDescription="Variable Resistor, Thru-Hole; 3 Leads", PackageReference=VR3, Published=24-Mar-1999, Publisher="Altium Limited", Set Position=0.5, Sim Note="Enter the Resistance value and the set point into parameter fields."
S1: library part KEY_2P, "KEY-2Pp"
U1: library part TPA6120, "耳放", BOM_Manufacturer=TI(德州仪器), BOM_Manufacturer Part=TPA6120A2DWP, BOM_Supplier=LCSC, BOM_Supplier Part=C2871054, Contributor=LCSC, link=https://atta.szlcsc.comnull, spicePre=U, spiceSymbolName=TPA6120A2DWP
U2: "耳放", BOM_JLCPCB Part Class="Extended Part", BOM_Manufacturer=TI(德州仪器), BOM_Manufacturer Part=OPA4134UA, BOM_Supplier=LCSC, BOM_Supplier Part=C2832240, Contributor=LCSC, spicePre=U, spiceSymbolName=OPA4134UA
U3 U10: "三端稳压(正电压)", BOM_JLCPCB Part Class="Extended Part", BOM_Manufacturer=HGSEMI(华冠), BOM_Manufacturer Part=LM7812T, BOM_Supplier=LCSC, BOM_Supplier Part=C2902509, Contributor=LCSC, spicePre=U, spiceSymbolName=LM7812T
U4 U5 U6 U7: "LM386", BOM_JLCPCB Part Class="Extended Part", BOM_Manufacturer="HTC Korea TAEJIN Tech", BOM_Manufacturer Part=LM386D, BOM_Supplier=LCSC, BOM_Supplier Part=C510560, Contributor=LCSC, spicePre=U, spiceSymbolName=LM386D
U8 U9: library part LM3915, "电平指示", BOM_JLCPCB Part Class="Extended Part", BOM_Manufacturer=XINLUDA(信路达), Frequency=-, BOM_Manufacturer Part=XD3915, BOM_Supplier=LCSC, BOM_Supplier Part=C609778, Contributor=LCSC, spicePre=U, spiceSymbolName=XD3915
U11: "USB充电宝", BOM_JLCPCB Part Class="Extended Part", BOM_Manufacturer=INJOINIC, BOM_Manufacturer Part=IP5209, BOM_Supplier=LCSC, BOM_Supplier Part=C181695, Contributor=LCSC, spicePre=U, spiceSymbolName=IP5209
U12: "三端稳压(负电压)", BOM_JLCPCB Part Class="Extended Part", BOM_Manufacturer=HGSEMI(华冠), BOM_Manufacturer Part=LM7812T, BOM_Supplier=LCSC, BOM_Supplier Part=C2902509, Contributor=LCSC, spicePre=U, spiceSymbolName=LM7812T
U13: "升压PWM", BOM_JLCPCB Part Class="Extended Part", BOM_Manufacturer=SX, BOM_Manufacturer Part=SX1308, BOM_Supplier=LCSC, BOM_Supplier Part=C78162, sourceId=g4Yg9rJ1j, spicePre=U, spiceSymbolName=SX1308, timeStamp=1472247539
USB1: library part USB_TYPEC_12P, "全引脚USB TYPEC母座", BOM_JLCPCB Part Class="Extended Part", BOM_Manufacturer=XUNPU(讯普), BOM_Manufacturer Part=TYPEC-304-ACP16, BOM_Supplier=LCSC, BOM_Supplier Part=C2982555, Contributor=LCSC, spicePre=U, spiceSymbolName=TYPEC-304-ACP16
USB2: library part USB-TYPEA, BOM_JLCPCB Part Class="Extended Part", BOM_Manufacturer=ValuePro, BOM_Manufacturer Part=YJ-USB-AF-SMT-01, BOM_Supplier=LCSC, BOM_Supplier Part=C8328, spicePre=U, spiceSymbolName=YJ-USB-AF-SMT-01

## Nets (pads, with @x,y where several pads share a name; then routed paths per layer and width w, separated by ;. In a path a pad name is that pad's centre, name@x,y a point inside that pad or via, vN(x,y) a via of type N, cw(c..) or ccw(c..) an arc to the next point about the centre after c; other vN are vias at no path point)
AL_12V: C35.1 C36.1 C51.1 C52.1 R50.1 R51.1 R54.2 R55.2 U3.3 U8.3 U8.9 U9.3 U9.9
AL_L_SIG: C50.2 R49.2 R53.2
AL_L_VU: C37.1 C38.2 R36.2 R38.2 R39.2
AL_R_SIG: C49.2 R48.2 R52.2
AL_R_VU: C46.2 R34.2 R43.2 R45.2
AL_VU_OUT: C34.1 H1.1 R35.1
AU_B_VN: C6.2 C7.2 C9.2 C10.2 C11.2 C13.2 C15.2 C62.1 C63.1 CON1.5 U1.1 U1.20 U2.11 U12.3
AU_B_VP: C1.2 C2.1 C3.1 C4.2 C5.2 C12.2 C14.1 C56.1 C57.1 CON1.4 U1.3 U1.18 U2.4 U10.3
AU_BLE_L: R4.2 R31.1
AU_BLE_LIN: C27.1 C31.2 CON1.20
AU_BLE_R: R1.2 R7.2
AU_BLE_RIN: C21.1 C25.2 CON1.19
AU_L: C19.2 CON1.15 R3.1 R4.1 R15.1
AU_L_OUT: CN1.2 CON1.14 R10.1 R21.4 R21.5 U4.3 U7.3
AU_R: C8.2 CON1.16 R1.1 R2.1 R16.2
AU_R_OUT: CN1.3 CN1.4 CON1.13 R11.2 R24.4 R24.5 U5.3 U6.3
AU_USB_L: R3.2 R30.1
AU_USB_LIN: C26.2 C30.1 CN2.2 CON1.18
AU_USB_R: R2.2 R6.2
AU_USB_RIN: C20.1 C24.1 CN2.3 CN2.4 CON1.17
GND: C1.1 C2.2 C3.2 C4.1 C5.1 C6.1 C7.1 C8.1 C9.1 C10.1 C11.1 C12.1 C13.1 C14.2 C15.1 C16.1 C17.2 C18.2 C19.1 C20.2 C21.2 C30.2 C31.1 C33.2 C34.2 C35.2 C36.2 C42.2 C43.2 C44.2 C51.2 C52.2 C53.1 C54.1 C55.2 C56.2 C57.2 C59.2 C60.2 C61.2 C62.2 C63.2 C64.2 C65.2 C66.2 C67.1 C69.2 C70.2 C71.1 C72.2 C73.2 C74.2 CN1.1 CN1.5 CN2.1 CN2.5 CON1.6 CON1.7 CON1.8 CON1.9 CON1.21 CON1.22 D28.1 H1.2 H3.3 H4.2 R5.2 R8.2 R9.1 R12.1 R21.6 R22.1 R23.1 R24.6 R27.2 R28.2 R29.1 R32.1 R37.2 R39.1 R44.1 R45.1 R46.1 R47.1 R48.1 R49.1 R56.2 R57.2 R58.2 R59.2 R60.2 R65.2 R67.2 R70.2 S1.2 U3.2 U4.2 U4.4 U5.2 U5.4 U6.2 U6.4 U7.2 U7.4 U8.2 U8.4 U8.8 U9.2 U9.4 U9.8 U10.2 U11.7 U11.12 U11.25 U12.2 U13.2 USB1.A1B12 USB1.B1A12 USB1.EP USB2.4 USB2.5
NetC22_1: C22.1 R5.1 R13.2 R17.2
NetC22_2: C22.2 R6.1 R13.1 U2.1
NetC23_1: C23.1 R7.1 R14.2 U2.14
NetC23_2: C23.2 R8.1 R14.1 R18.1
NetC24_2: C24.2 R9.2 U2.3
NetC25_1: C25.1 R12.2 U2.12
NetC26_1: C26.1 R27.1 U2.5
NetC27_2: C27.2 R28.1 U2.10
NetC28_1: C28.1 R19.2 R25.2 R29.2
NetC28_2: C28.2 R25.1 R30.2 U2.7
NetC29_1: C29.1 R26.2 R31.2 U2.8
NetC29_2: C29.2 R20.1 R26.1 R32.2
NetC32_1: C32.1 U4.1
NetC32_2: C32.2 R33.2
NetC33_1: C33.1 U4.7
NetC37_2: C37.2 C38.1 R38.1 U4.5
NetC39_1: C39.1 U5.1
NetC39_2: C39.2 R40.2
NetC40_1: C40.1 U6.1
NetC40_2: C40.2 R41.1
NetC41_1: C41.1 U7.1
NetC41_2: C41.2 R42.1
NetC42_1: C42.1 U5.7
NetC43_1: C43.1 U6.7
NetC44_1: C44.1 U7.7
NetC45_1: C45.1 R44.2
NetC45_2: C45.2 C46.1 R43.1 U5.5
NetC47_1: C47.1 R46.2
NetC47_2: C47.2 C49.1 U6.5
NetC48_1: C48.1 R47.2
NetC48_2: C48.2 C50.1 U7.5
NetC58_2: C58.2 L1.2 U11.13 U11.14 U11.15
NetC60_1: C60.1 R63.1
NetC64_1: C64.1 C66.1 L1.1 R68.1 U11.11
NetC68_1: C68.1 D27.2 L2.1 R69.2 U13.1
NetC68_2: C68.2 D26.1 D28.2
NetD1_1: D1.1 R37.1
NetD1_2: D1.2 R34.1 R35.2 R35.3 R36.1
NetD2_1: D2.1 U8.1
NetD2_2: D2.2 D4.2 D6.2 D8.2 D10.2 D12.2 D14.2 D16.2 D18.2 D20.2 R50.2
NetD3_1: D3.1 U9.1
NetD3_2: D3.2 D5.2 D7.2 D9.2 D11.2 D13.2 D15.2 D17.2 D19.2 D21.2 R51.2
NetD4_1: D4.1 U8.18
NetD5_1: D5.1 U9.18
NetD6_1: D6.1 U8.17
NetD7_1: D7.1 U9.17
NetD8_1: D8.1 U8.16
NetD9_1: D9.1 U9.16
NetD10_1: D10.1 U8.15
NetD11_1: D11.1 U9.15
NetD12_1: D12.1 U8.14
NetD13_1: D13.1 U9.14
NetD14_1: D14.1 U8.13
NetD15_1: D15.1 U9.13
NetD16_1: D16.1 U8.12
NetD17_1: D17.1 U9.12
NetD18_1: D18.1 U8.11
NetD19_1: D19.1 U9.11
NetD20_1: D20.1 U8.10
NetD21_1: D21.1 U9.10
NetD22_1: D22.1 D23.2 U11.24
NetD22_2: D22.2 D23.1 D24.2 D25.1 U11.2
NetD24_1: D24.1 D25.2 U11.1
NetH2_1: H2.1 R61.1
NetH2_2: H2.2 U11.22
NetH3_2: H3.2 R64.2
NetR10_2: R10.2 U1.2
NetR11_1: R11.1 U1.19
NetR15_2: R15.2 U1.4
NetR16_1: R16.1 U1.17
NetR17_1: R17.1 U2.2
NetR18_2: R18.2 U2.13
NetR19_1: R19.1 U2.6
NetR20_2: R20.2 U2.9
NetR21_1: R21.1 R21.2 R21.3 R22.2 U1.5
NetR23_2: R23.2 R24.1 R24.2 R24.3 U1.16
NetR33_1: R33.1 U4.8
NetR40_1: R40.1 U5.8
NetR41_2: R41.2 R41.3 U6.8
NetR42_2: R42.2 R42.3 U7.8
NetR52_1: R52.1 U8.5
NetR53_1: R53.1 U9.5
NetR54_1: R54.1 R56.1 U8.6
NetR55_1: R55.1 R58.1 U9.6
NetR57_1: R57.1 U8.7
NetR59_1: R59.1 U9.7
NetR60_1: R60.1 R62.1 U11.23
NetR65_1: R65.1 U11.5
NetR66_1: R66.1 R67.1 U11.6
PWR_5V: C16.2 C17.1 C18.1 C72.1 CON1.1 CON1.2 CON1.3 H3.1 L2.2 R61.2 R64.1 U4.6 U5.6 U6.6 U7.6 U13.4 U13.5
PWR_DC_FB: R69.1 R69.3 R70.1 U13.3
PWR_DM: U11.18 USB2.2
PWR_DP: U11.19 USB2.3
PWR_HN0: C70.1 C71.2 D26.2 U12.1
PWR_HP0: C73.1 C74.1 D27.1 U3.1 U10.1
PWR_LED_KEY: CON1.10 S1.1 U11.8
PWR_USB_DM: CON1.12 USB1.A7 USB1.B7
PWR_USB_DP: CON1.11 USB1.A6 USB1.B6
PWR_VBAT: C65.1 C67.2 C69.1 H4.1 R68.2 U11.9 U11.10
PWR_VIN: C59.1 R63.2 U11.20 U11.21 USB1.A4B9 USB1.B4A9
PWR_VOUT: C53.2 C54.2 C55.1 C58.1 U11.16 U11.17 USB2.1
PWR_VREG: C61.1 R62.2 R66.2 U11.3 U11.4
pads on no net: U1.6 U1.7 U1.8 U1.9 U1.10 U1.11 U1.12 U1.13 U1.14 U1.15 U1.21 U13.6 USB1. USB1.A5 USB1.A8 USB1.B5 USB1.B8 USB2.

## Silkscreen, mask and mechanical layers (free items; w line width, h text height)
Top Overlay:
  lines w10: 2875,460 2875,4000
Mechanical 1:
  the board outline again, w10

## Text inside footprints (layer, text, board x,y; h text height)
C2: Top Overlay "+" at 4185,2190 h30
C3: Top Overlay "+" at 5132,3845 h30
C10: Top Overlay "+" at 3440,3290 h30
C11: Top Overlay "+" at 5497,3855 h30
C14: Top Overlay "+" at 3810,2180 h30
C15: Top Overlay "+" at 5483,3455 h30
C17: Top Overlay "+" at 3797,2585 h30
C18: Top Overlay "+" at 3450,2605 h30
C35: Top Overlay "+" at 3615,1575 h30
C38: Top Overlay "+" at 3795,2950 h30
C46: Top Overlay "+" at 5090,2200 h30
C49: Top Overlay "+" at 3445,2925 h30
C50: Top Overlay "+" at 5742,3040 h30
C55: Top Overlay "+" at 5842,3845 h30
C56: Top Overlay "+" at 5375,3035 h30
C62: Top Overlay "+" at 5130,3460 h30
C71: Top Overlay "+" at 5500,1650 h30
C73: Top Overlay "+" at 5850,3455 h30